# EAGLE board mcp3008_rpi_new (EAGLE 7.2.0)
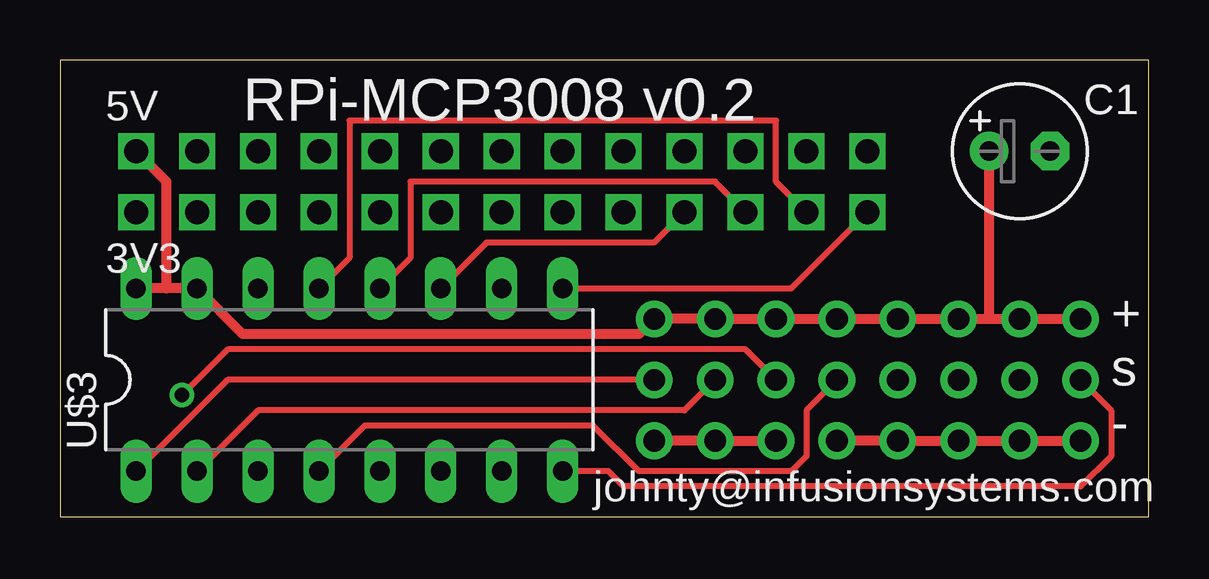
[diagram p0: board, top side]
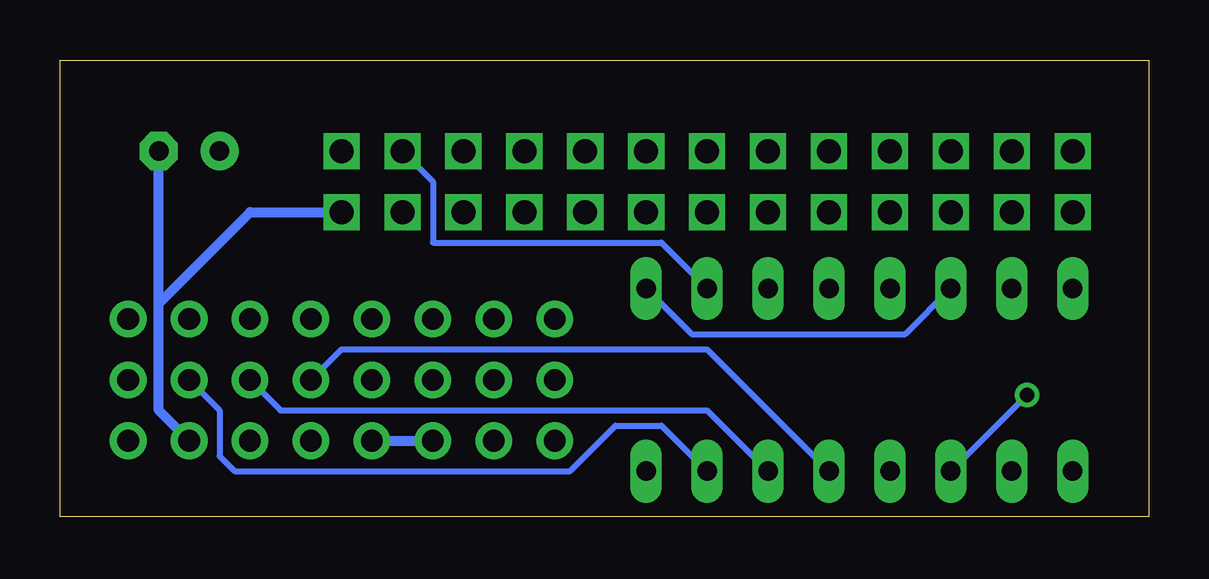
[diagram p1: board, bottom side, seen from below]

Size 45.39 x 19.04 mm. Coordinates in mm from the lower left corner, seen from the top.
Outline: 0,0 45.39,0 45.39,19.04 0,19.04 0,0
Copper layers (1*16): Top 0.035mm / dielectric 1.5mm / Bottom 0.035mm
Design rules "default": minimum track width 10mil, minimum drill 24mil, track to track 8mil, track to pad 8mil, pad to pad 8mil, via to via 8mil, smd to smd 8mil, copper to edge 40mil, drill to drill 8mil, minimum pad ring 10mil, minimum via ring 8mil, stop-mask expansion 4mil, vias tented up to drill 0mil, thermal gap 10mil
Net classes: 0 default: width 0.254 mm

## Footprints (pad centres in the part's own frame; a part is rotated, then mirrored left to right if it is on the bottom)
E2,5-6 = drill 0.813 pad 1.6: + -1.27,0 | drill 0.813 pad 1.6 octagon: - 1.27,0
3X8_PKG = drill 0.9 pad 1.524: GND0 -5.08,-3.81; GND1 -2.54,-3.81; GND2 0,-3.81; GND3 2.54,-3.81; GND4 5.08,-3.81; GND5 7.62,-3.81; GND6 10.16,-3.81; GND7 12.7,-3.81; S0 -5.08,-1.27; S1 -2.54,-1.27; S2 0,-1.27; S3 2.54,-1.27; S4 5.08,-1.27; S5 7.62,-1.27; S6 10.16,-1.27; S7 12.7,-1.27; VCC0 -5.08,1.27; VCC1 -2.54,1.27; VCC2 0,1.27; VCC3 2.54,1.27; VCC4 5.08,1.27; VCC5 7.62,1.27; VCC6 10.16,1.27; VCC7 12.7,1.27
RPI26 = drill 1 square: 3V3_0 -13.97,-1.27; 3V3_1 6.35,-1.27; 5V0 -13.97,1.27; 5V1 -11.43,1.27; GND0 -8.89,1.27; GND1 1.27,1.27; GND2 8.89,1.27; GND3 -3.81,-1.27; GND4 16.51,-1.27; GPIO0 -11.43,-1.27; GPIO01 -8.89,-1.27; GPIO04 -6.35,-1.27; GPIO07 16.51,1.27; GPIO08 13.97,1.27; GPIO09 11.43,-1.27; GPIO10 8.89,-1.27; GPIO11 13.97,-1.27; GPIO14 -6.35,1.27; GPIO15 -3.81,1.27; GPIO17 -1.27,-1.27; GPIO18 -1.27,1.27; GPIO21 1.27,-1.27; GPIO22 3.81,-1.27; GPIO23 3.81,1.27; GPIO24 6.35,1.27; GPIO25 11.43,1.27
DIL16 = drill 0.813 long: 1 -8.89,-3.81; 2 -6.35,-3.81; 3 -3.81,-3.81; 4 -1.27,-3.81; 5 1.27,-3.81; 6 3.81,-3.81; 7 6.35,-3.81; 8 8.89,-3.81; 9 8.89,3.81; 10 6.35,3.81; 11 3.81,3.81; 12 1.27,3.81; 13 -1.27,3.81; 14 -3.81,3.81; 15 -6.35,3.81; 16 -8.89,3.81

## Placement (x,y rotation side)
C1  [E2,5-6]  40.01,15.24 0 top
U$1  3BY83X8_SAMTEC  [3X8_PKG]  29.84,6.99 0 top
U$2  RPI_26  [RPI26]  17.14,13.97 0 top
U$3  MCP3008P  [DIL16]  12.06,5.71 0 top

## Library data of the parts
C1 = rcl
U$1 U$2 = jt_lib
U$3 = MCP3008

## Nets
GND: C1.- U$1.GND0 U$1.GND1 U$1.GND2 U$1.GND3 U$1.GND4 U$1.GND5 U$1.GND6 U$1.GND7 U$2.GND4 U$3.9 U$3.14
N$1: U$1.S0 U$3.1
N$2: U$1.S1 U$3.2
N$3: U$1.S2 U$3.3
N$4: U$1.S3 U$3.4
N$5: U$1.S4 U$3.5
N$6: U$1.S5 U$3.6
N$7: U$1.S6 U$3.7
N$8: U$1.S7 U$3.8
N$9: U$2.GPIO09 U$3.12
N$10: U$2.GPIO11 U$3.13
N$11: U$2.GPIO10 U$3.11
N$12: U$2.GPIO08 U$3.10
VCC: C1.+ U$1.VCC0 U$1.VCC1 U$1.VCC2 U$1.VCC3 U$1.VCC4 U$1.VCC5 U$1.VCC6 U$1.VCC7 U$2.5V0 U$3.15 U$3.16

## Tracks (layer width: path | path; a pad name or v marks a point on that pad's centre or on a via)
GND
  Top 0.254: U$2.GND4 30.48,9.53 U$3.9
  Top 0.406: U$1.GND0 U$1.GND1 U$1.GND2 | U$1.GND3 U$1.GND4 U$1.GND5 U$1.GND6 U$1.GND7
  Bottom 0.254: U$3.14 10.16,7.62 19.05,7.62 U$3.9
  Bottom 0.406: 41.27,8.89 41.27,4.45 U$1.GND6 | 41.27,8.89 C1.- | U$1.GND3 U$1.GND2 | U$2.GND4 37.47,12.7 41.27,8.89
N$1
  Top 0.254: U$3.1 6.99,5.71 U$1.S0
N$2
  Top 0.254: U$3.2 8.26,4.45 26.04,4.45 U$1.S1
N$3  (via drill 0.61)
  Top 0.254: v5.08,5.08 6.99,6.99 28.57,6.99 U$1.S2
  Bottom 0.254: v5.08,5.08 U$3.3
N$4
  Top 0.254: U$3.4 12.7,3.81 22.22,3.81 24.13,1.91 30.48,1.91 31.11,2.54 31.11,4.45 U$1.S3
N$5
  Bottom 0.254: U$3.5 18.41,6.99 33.66,6.99 U$1.S4
N$6
  Bottom 0.254: U$3.6 18.41,4.45 36.2,4.45 U$1.S5
N$7
  Bottom 0.254: U$3.7 20.32,3.81 22.22,3.81 24.13,1.91 38.1,1.91 38.73,2.54 38.73,4.45 U$1.S6
N$8
  Top 0.254: U$3.8 22.86,1.91 23.49,1.27 42.55,1.27 43.82,2.54 43.82,4.45 U$1.S7
N$9
  Top 0.254: U$3.12 14.61,10.79 14.61,13.97 27.3,13.97 U$2.GPIO09
N$10
  Top 0.254: U$3.13 12.06,10.79 12.06,16.51 29.84,16.51 29.84,13.97 U$2.GPIO11
N$11
  Top 0.254: U$3.11 17.78,11.43 24.76,11.43 U$2.GPIO10
N$12
  Bottom 0.254: U$3.10 20.32,11.43 29.84,11.43 29.84,13.97 U$2.GPIO08
VCC
  Top 0.406: 4.45,9.53 U$3.15 7.62,7.62 24.13,7.62 U$1.VCC0 U$1.VCC1 U$1.VCC2 U$1.VCC3 U$1.VCC4 U$1.VCC5 38.73,8.26 | 4.45,9.53 U$3.16 | U$2.5V0 4.45,13.97 4.45,9.53 | 38.73,8.26 U$1.VCC6 U$1.VCC7 | 38.73,8.26 C1.+

## Text on the board
tNames: RPi-MCP3008 v0.2 | + / s / - | johnty@infusionsystems.com